# Altium PCB Misko 3.PcbDoc (part 3 of 4)
Units mm, origin at the board's own origin, x right, y up, seen from the top; angles counter-clockwise.
Board outline 128.1 x 53.3 mm, 6 copper layers (Top (LS), Mid 1 (LS), Mid 2 (GND), Mid 3 (P/HS), Mid 4 (GND), Bottom (HS)), stack 1.597 mm thick; 230 components, 214 nets, 896 pads, 500 vias.
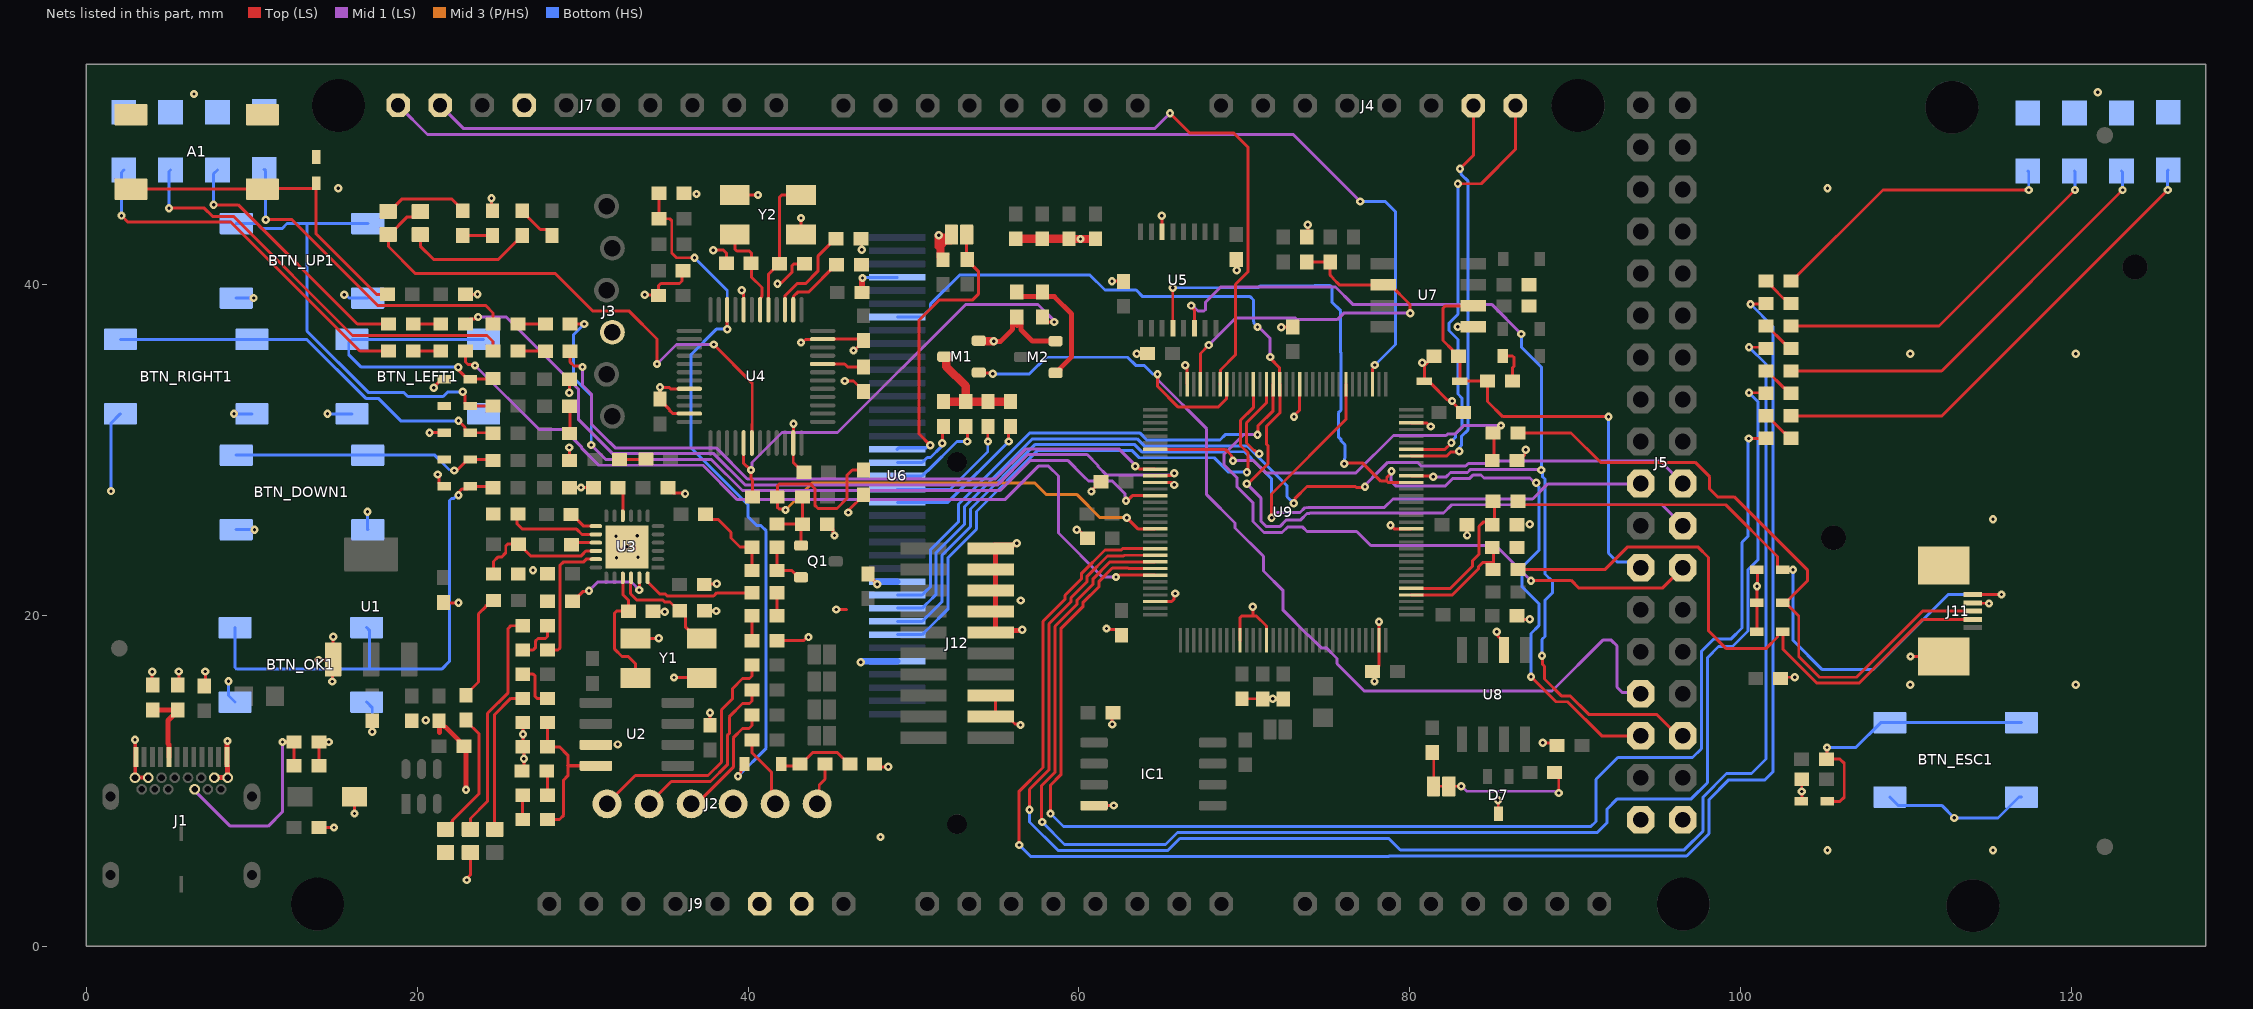
[diagram p7: the nets of this part, all layers, seen from the top]

## Via types
v1: diameter 0.5, hole 0.2, Top (LS) to Bottom (HS), tented both sides, 500 vias

## Nets (pads, with @x,y where several pads share a name; then routed paths per layer and width w, separated by ;. In a path a pad name is that pad's centre, name@x,y a point inside that pad or via, vN(x,y) a via of type N, cw(c..) or ccw(c..) an arc to the next point about the centre after c; other vN are vias at no path point) (continued)
GND: A1.3 A1.4 BTN_DOWN1.3 BTN_DOWN1.4 BTN_ESC1.3 BTN_ESC1.4 BTN_LEFT1.3 BTN_LEFT1.4 BTN_OK1.3 BTN_OK1.4 BTN_RIGHT1.3 BTN_RIGHT1.4 BTN_UP1.3 BTN_UP1.4 C1.1 C2.1 C3.1 C4.1 C5.1 C6.1 C7.1 C8.1 C9.1 C10.2 C11.2 C12.1 C13.1 C14.1 C15.1 C16.1 C17.1 C18.1 C19.1 C20.1 C21.1 C22.1 C23.1 C24.1 C25.1 C27.1 C28.1 C29.1 C30.1 C31.1 C32.1 C33.1 C34.1 C35.1 C36.1 C37.2 C38.1 C39.1 C40.1 C41.1 C42.1 C43.1 C44.1 C45.1 C46.1 C47.1 C48.1 C49.1 C50.1 C51.1 C52.1 C53.1 C54.1 C55.1 C56.1 C57.1 C58.1 C59.1 C60.1 D6.1 D7.3 D8.2 D9.2 D10.2 D11.2 D12.2 D13.2 D14.2 D15.2 D16.2 D17.2 IC1.4 J1.A1 J1.A12 J1.B1 J1.B12 J1.G1 J1.G2 J2.3 J3.4 J5.35 J5.36 J7.7 J9.6 J9.7 J11.0 J11.2 J12.3 J12.5 J12.11 J12.13 J12.15 J12.17 J12.19 LED1.1 LED3.1 LED6.1 LED7.1 LED8.1 LED9.1 LED10.1 LED11.1 LED12.1 LED13.1 M1.2 M2.2 R1.2 R2.2 R3.2 R4.2 R5.2 R10.1 R11.1 R16.1 R19.1 R24.1 R27.1 R29.1 R35.2 R43.2 R44.2 R45.1 R46.2 R51.2 R61.1 R66.2 R94.2 SB5.1 U1.1 U2.3 U3.25 U4.8 U4.20 U4.23 U4.35 U4.47 U5.6 U6.5 U6.11 U6.34 U7.5 U8.2 U9.12 U9.30 U9.42 U9.46 U9.63 U9.78 U9.94 U9.110 U9.127 Y1.2 Y1.4 Y2.2 Y2.4 | length 185.7
  Top (LS) w0.15: D7.3@85.35,8 85.325,8.025 v1(85.325,8.821) 85.392,8.754 v1@85.496,8.754 ; C41.1@86.574,29.355 86.624,29.355 86.949,29.68 86.949,29.949 v1(87,30) ; C49.1@103.684,10.091 103.689,10.086 v1(103.689,9.35) ; J11.2@114.013,20.75 114.033,20.73 114.98,20.73 v1(115,20.71)
  Top (LS) w0.18: v1(3.988,16.586) 3.988,15.811 R2.2@4.026,15.773 ; R1.2@5.526,15.773 5.6,15.847 v1(5.6,16.6) ; C2.1@7.129,15.723 7.2,15.794 v1(7.2,16.6) ; v1(14.06,17.291) 14.585,17.291 U1.1@14.619,17.325 ; R5.2@14.069,7.173 v1(14.973,7.173) ; R3.2@14.069,10.901 R4.2@14.069,12.336 14.071,12.334 v1(14.667,12.334) ; v1(14.877,15.994) U1.1@14.877,16.821 ; U1.1@14.919,17.325 14.924,17.33 v1(14.924,18.697) ; v1(16.219,8.019) C3.1@16.219,9.03 ; C6.1@17.282,13.573 17.288,13.567 v1(17.288,12.954) ; v1(20.75,31.029) 20.752,31.028 D15.2@21.642,31.026 D15.2@21.642,31.026 ; v1(21,33.75) 21,33.781 21.479,34.26 D13.2@21.642,34.26 ; v1(21.25,28.5) 21.25,28.413 21.319,28.344 21.319,27.952 21.479,27.792 D16.2@21.642,27.792 ; C7.1@21.601,20.769 21.62,20.75 v1(22.5,20.75) ; D12.2@21.629,29.422 D12.2@21.642,29.409 ; D11.2@21.634,32.651 D11.2@21.642,32.643 ; C46.1@22.929,39.393 v1(23.643,39.393) ; v1(23,4) 23,4.087 23.219,4.306 LED3.1@23.219,5.658 ; v1(24.5,45.2) 24.5,44.495 R51.2@24.552,44.443 ; C9.1@26.332,10.584 26.453,10.705 v1(26.453,11.324) 26.453,12.012 26.4,12.065 v1(26.4,12.8) 26.4,13.492 R11.1@26.382,13.51 ; C48.1@29.2,27.7 29.222,27.722 v1(29.904,27.722) 30.628,27.722 C10.2@30.65,27.7 ; C44.1@29.2,29.342 v1(29.2,30.133) ; C47.1@29.2,30.983 29.233,31.016 29.233,32.592 C43.1@29.2,32.625 ; v1(29.2,33.451) C45.1@29.2,34.267 ; Y1.4@33.2,18.6 v1(34.6,18.6) ; v1(33.761,39.361) 34.537,39.361 C19.1@34.578,39.321 34.578,39.893 34.726,40.042 35.861,40.042 36.01,40.19 36.01,40.749 C23.1@36.078,40.817 ; C12.1@34.266,20.242 34.308,20.2 v1(34.97,20.2) ; C15.1@35.15,27.7 35.46,27.39 36.143,27.39 v1(36.195,27.338) ; v1(35.519,16.231) 37.169,16.231 Y1.2@37.2,16.2 ; U4.23@36.456,32.182 35.449,32.182 35.239,32.392 35.239,32.443 34.675,33.007 C18.1@34.675,33.057 v1(34.675,33.771) 35.224,33.771 35.312,33.682 U4.20@36.456,33.682 ; C16.1@37.353,21.854 37.398,21.899 v1(38.1,21.899) ; C13.1@37.37,20.274 37.389,20.255 v1(38.081,20.255) ; C8.1@37.7,13.35 v1(37.7,14.1) ; v1(37.897,42.062) 38.509,42.062 38.688,41.883 C25.1@38.688,41.265 ; Y2.2@39.2,45.4 v1(40.6,45.4) ; v1(39.612,39.636) 39.612,39.549 39.718,39.443 39.718,38.471 U4.8@39.731,38.457 ; R24.1@41.739,18.456 41.759,18.476 43.368,18.476 43.568,18.676 v1(43.655,18.676) ; v1(41.781,40.031) 41.843,40.092 42.025,40.092 42.648,40.715 42.648,41.108 42.775,41.235 C24.1@43.408,41.235 ; v1(42.75,31.575) 42.741,31.566 42.741,31.086 42.731,31.076 U4.35@42.731,30.407 42.731,29.234 43.32,28.646 C17.1@43.37,28.646 ; v1(43.2,36.484) 43.287,36.484 43.471,36.669 44.493,36.669 U4.47@44.506,36.682 46.883,36.682 C21.1@46.97,36.596 46.97,36.546 46.424,36 v1(46.374,36) ; Y2.4@43.2,43 v1(43.2,44) ; R35.2@44.788,25.498 44.838,25.498 45.148,25.188 45.148,24.975 45.22,24.903 v1(45.22,24.816) ; v1(45.33,20.34) 45.95,20.34 45.96,20.35 ; v1(45.84,34.158) 46.37,34.158 46.97,33.558 R45.1@46.97,33.508 ; v1(46.06,26.209) 46.121,26.27 46.121,26.381 46.97,27.23 C22.1@46.97,27.28 ; R44.2@46.824,42.75 46.863,42.711 v1(46.863,42.088) ; C30.1@47.25,22.5 47.25,22.45 47.803,21.897 v1(47.803,21.873) ; R27.1@47.65,11 47.814,10.836 v1(48.467,10.836) ; C29.1@51.778,41.48 C29.1@52.088,41.79 ; v1@51.778,42.968 51.98,42.968 52,42.948 SB5.1@52,42.722 ; SB5.1@52.29,42.49 52.28,42.5 52,42.5 52,42.56 52.12,42.68 52.29,42.85 52.408,42.968 52.29,42.968 52.258,42.968 SB5.1@52.29,43 ; J12.3@54.665,13.87 J12.3@54.964,13.87 ; J12.5@54.665,15.14 54.684,15.14 54.964,14.86 J12.3@54.964,13.87 ; v1(56.46,13.361) 56.399,13.422 56.14,13.422 55.692,13.87 J12.3@54.964,13.87 ; v1(59.857,25.161) 59.918,25.099 60.013,25.099 60.457,24.655 C50.1@60.507,24.655 ; v1(60.75,27.475) 60.75,27.522 61.287,28.059 C57.1@61.337,28.059 ; IC1.4@60.914,8.495 60.917,8.497 62.097,8.497 v1(62.1,8.5) ; v1(61.663,19.199) 61.713,19.15 62.26,19.15 62.57,18.84 C55.1@62.57,18.79 ; v1(62.001,40.187) 62.671,40.187 C28.1@62.687,40.171 ; v1(62.004,13.4) 62.004,14.054 R94.2@62.05,14.1 ; v1(63.495,35.796) 64.12,35.796 C58.1@64.145,35.821 ; U9.30@64.598,20.823 65.605,20.823 65.755,20.973 65.755,21.255 v1(65.816,21.316) ; U9.12@64.598,28.023 64.608,28.013 65.582,28.013 65.72,27.875 v1(65.76,27.875) ; v1(65,44.136) 65.012,44.124 65.012,43.18 U5.6@65.025,43.168 ; v1(66.419,35.109) 66.419,35.023 66.526,34.916 66.526,33.971 U9.127@66.536,33.961 ; C27.1@69.525,41.725 69.529,41.721 v1(69.529,40.847) ; U9.42@69.736,18.485 69.743,18.492 69.743,19.86 69.848,19.965 70.554,19.965 ; C51.1@69.852,14.95 C52.1@71.1,14.95 ; v1(70.507,20.507) 70.507,20.012 70.554,19.965 ; C52.1@71.1,14.944 v1(71.714,14.944) v1@71.719,14.95 ; U9.46@71.336,18.485 71.326,18.495 71.326,19.343 70.703,19.965 70.554,19.965 ; v1(72.225,37.41) 72.91,37.41 C59.1@72.925,37.425 ; v1(73,32) 73,32.064 73.336,32.4 U9.110@73.336,33.961 ; R61.1@73.763,42.847 73.833,42.917 v1(73.833,43.6) ; v1(77.855,15.999) 77.855,16.495 C54.1@77.75,16.6 77.8,16.6 78.136,16.936 U9.63@78.136,18.485 v1(78.136,19.605) ; v1(78.825,25.43) 78.844,25.43 79.051,25.223 U9.78@80.074,25.223 ; U9.94@80.074,31.623 81.001,31.623 81.221,31.402 v1(81.254,31.402) ; C37.2@81.444,35.649 81.394,35.649 81.084,35.339 81.084,35.289 80.869,35.074 D6.1@80.869,34.149 81.004,34.014 81.254,34.014 82.258,33.011 82.489,33.011 v1(82.55,32.95) 82.55,32.9 83.2,32.25 C60.1@83.25,32.25 ; v1(82.897,37.424) U7.5@83.829,37.424 ; C53.1@83.44,25.473 83.456,25.457 v1(83.456,24.823) ; v1(85.25,19) 85.311,18.939 85.311,18.735 85.678,18.369 U8.2@85.678,17.894 ; C38.1@86.622,20.023 86.622,19.962 86.834,19.75 v1(87.25,19.75) ; v1(88.032,12.29) 88.535,12.29 88.563,12.318 R66.2@88.563,12.348 ; D8.2@100.962,19 100.989,19.027 100.989,20.723 D10.2@100.962,20.75 100.974,20.762 v1(100.974,21.75) ; D9.2@100.962,22.75 101,22.712 v1@101,21.75 ; C39.1@102.4,16.168 102.482,16.25 v1(103.25,16.25) ; D17.2@103.646,8.75 103.689,8.794 v1(103.689,9.35) ; v1(110.25,17.5) J11.0@112.263,17.5
  Top (LS) w0.22: v1(2.95,12.48) 2.968,12.462 2.968,11.456 J1.A1@2.986,11.438 ; J1.A1@2.961,11.441 2.961,10.213 2.936,10.188 J1.G2@3.736,10.188
  Top (LS) w0.3: J1.G1@7.736,10.188 8.536,10.188 J1.B1@8.55,10.202 ; J1.A12@8.5,11.43 8.5,10.98 8.55,10.93 J1.B1@8.55,10.202 ; J1.A12@8.511,11.463 8.511,12.369 v1(8.536,12.394) ; J1.B1@8.55,10.18 J1.B1@8.55,10.202 ; 21.359,12.91 C5.1@21.359,13.533 ; v1(22.959,9.458) 22.959,12.05 22.909,12.05 21.7,13.259 21.633,13.259 C5.1@21.359,13.533 ; J12.11@54.665,18.95 54.8,19.085 56.527,19.085 v1(56.565,19.123) ; J12.13@54.665,20.22 J12.13@54.744,20.22 ; J12.15@54.665,21.49 J12.15@54.744,21.49 ; J12.17@54.665,22.76 J12.17@54.744,22.76 ; J12.19@54.665,24.03 54.885,24.25 56.086,24.25 56.178,24.342 v1(56.232,24.342) ; J12.19@54.744,24.03 54.964,23.81 54.964,22.98 J12.17@54.744,22.76 ; v1(54.856,36.555) 55.264,36.555 55.991,37.282 55.991,37.777 R46.2@56.241,38.027 ; J12.11@54.964,19.162 54.964,20 J12.13@54.744,20.22 ; 56.244,37.508 56.244,38.024 R46.2@56.241,38.027 ; M2.2@58.584,36.562 57.19,36.562 56.491,37.261 56.491,37.777 R46.2@56.241,38.027 ; C5.1@21.359,13.533 21.359,13.583 C5.1@21.323,13.619 21.323,13.569 C5.1@21.359,13.533 ; J12.13@54.744,20.22 54.964,20.44 54.964,21.27 J12.15@54.744,21.49 ; J12.15@54.744,21.49 54.964,21.71 54.964,22.54 J12.17@54.744,22.76
  Top (LS) w0.381: C20.1@46.89,39.502 46.891,39.503 46.891,40.328 46.915,40.352 v1(46.915,40.384)
  Top (LS) w0.5: C29.1@51.778,41.48 51.628,41.63 51.628,42.162 ; 51.778,42.488 51.61,42.32 51.61,42.208 ; 51.778,42.722 v1(51.532,42.968) 51.532,42.286 51.61,42.208 ; SB5.1@51.895,42.605 51.97,42.68 52.12,42.68 52.14,42.68 52.29,42.83 52.29,42.85 52.29,42.968 SB5.1@52.29,43 ; M1.2@53.946,36.587 53.977,36.555 v1(54.856,36.555) ; C34.1@56.174,42.75 C33.1@57.783,42.75 C32.1@59.391,42.75 ; C32.1@59.433,42.635 59.529,42.73 v1(60.091,42.73) 60.98,42.73 C31.1@61,42.75 ; 51.61,42.208 51.61,42.18 51.628,42.162 ; 51.61,42.208 51.628,42.19 51.628,42.162
  Bottom (HS) w0.15: v1(46.915,40.384) v1@46.935,40.404 ; U6.34@49.002,40.404 U6.34@49.022,40.423
  Bottom (HS) w0.18: v1(1.5,27.5) 1.5,31.607 2.06,32.167 BTN_RIGHT1.4@2.067,32.167 ; v1(8.6,16) 8.6,15.15 BTN_OK1.4@9,14.75 ; v1(8.938,32.167) BTN_RIGHT1.3@10.017,32.167 ; BTN_DOWN1.4@9.067,25.167 v1(10.174,25.167) ; BTN_UP1.4@9.067,39.167 v1(10.117,39.167) ; v1(14.588,32.167) BTN_LEFT1.4@16.067,32.167 ; v1(15.6,39.369) 15.687,39.369 15.887,39.169 17.015,39.169 BTN_UP1.3@17.017,39.167 ; BTN_OK1.3@16.95,14.75 17.288,14.412 v1(17.288,12.954) ; v1(17,26.25) 17,25.184 BTN_DOWN1.3@17.017,25.167 ; BTN_ESC1.4@109.004,9.006 109.499,8.511 112.138,8.511 v1(112.899,7.75) 115.548,7.75 116.804,9.006 BTN_ESC1.3@116.954,9.006
  Bottom (HS) w0.2: v1@46.935,40.404 U6.34@49.002,40.404
  Bottom (HS) w0.381: v1(46.808,17.15) 46.84,17.15 46.914,17.223 U6.5@49.022,17.223 ; v1(47.803,21.873) 47.803,22.014 47.812,22.023 U6.11@49.022,22.023
  other v1: 105.24,5.8 115.24,5.8 48,6.6 32.131,12.192 20.524,13.647 110.24,15.8 120.24,15.8 56.488,20.888 27,22.722 32.051,23.467 33.347,23.502 32.681,24.132 32.016,24.763 33.312,24.798 87.25,25.5 115.24,25.8 80.75,35.25 110.24,35.8 120.24,35.8 36.878,45.456 15.24,45.8 105.24,45.8 6.515,51.5 121.578,51.601
I2C1_SCL: J7.10 U9.99 | length 73.9
  Top (LS) w0.18: U9.99@77.736,33.961 77.736,34.891 77.878,35.034 v1(77.878,35.12)
  Mid 1 (LS) w0.18: J7.10@18.854,50.82 20.624,49.05 72.95,49.05 v1(77,45)
  Bottom (HS) w0.18: v1(77,45) 78.513,45 79.127,44.386 79.127,36.364 77.884,35.12 v1(77.878,35.12)
I2C1_SDA: J7.9 U9.122 | length 65.7
  Top (LS) w0.18: v1(65.5,50.339) 66.707,49.132 69.371,49.132 70.217,48.286 70.217,40.752 69.46,39.996 69.46,35.733 68.546,34.819 68.546,33.971 U9.122@68.536,33.961
  Mid 1 (LS) w0.18: J7.9@21.394,50.82 22.814,49.4 64.561,49.4 v1(65.5,50.339)
I2C2_SCL: J4.1 U9.90 | length 26.1
  Top (LS) w0.18: U9.90@80.074,30.023 82.119,30.023 82.507,30.411 v1(82.507,30.416) ; v1(82.9,46.075) 84.307,46.075 86.371,48.139 J4.1@86.371,50.8
  Bottom (HS) w0.18: v1(82.507,30.416) 82.507,30.503 82.747,30.743 82.747,30.947 83.16,31.36 83.16,33.104 82.9,33.364 82.9,36.658 82.357,37.201 82.357,37.648 82.9,38.191 v1(82.9,46.075)
I2C2_SDA: J4.2 U9.89 | length 24.7
  Top (LS) w0.18: U9.89@80.074,29.623 80.084,29.633 82.238,29.633 82.46,29.855 82.935,29.855 v1(82.98,29.9) ; v1(83.025,46.975) 83.831,47.781 J4.2@83.831,50.8
  Bottom (HS) w0.18: v1(82.98,29.9) 83.041,29.961 83.041,30.187 83.107,30.253 83.107,30.798 83.52,31.211 83.52,46.219 83.086,46.652 83.086,46.914 v1(83.025,46.975)
JOY_BTN: C41.2 R68.1 U9.7 | length 25.1
  Top (LS) w0.18: U9.7@64.598,30.023 68.834,30.023 69.211,29.647 69.211,29.596 69.248,29.559 69.248,29.399 v1(69.309,29.337) ; R68.1@85.024,31.017 85.074,30.967 C41.2@85.074,29.355 ; R68.1@85.074,31.017 85.5,31.444 v1(85.5,31.46)
  Mid 1 (LS) w0.18: v1(69.309,29.337) 70.553,29.337 71.285,28.606 76.749,28.606 79.005,30.862 82.189,30.862 82.284,30.956 82.745,30.956 83.249,31.46 v1(85.5,31.46)
JOY_X: C42.2 R69.1 U9.68 | length 7.1
  Top (LS) w0.18: U9.68@80.074,21.223 82.566,21.223 84.15,22.807 84.15,22.934 84.391,23.175 85.061,23.175 C42.2@85.061,24.402
JOY_Y: C40.2 R67.1 U9.69 | length 9.1
  Top (LS) w0.18: U9.69@80.074,21.623 82.457,21.623 83.79,22.956 83.79,23.29 84.18,23.68 84.18,25.372 84.426,25.619 85.061,25.619 85.111,25.669 R67.1@85.111,26.885
LCD_BKLT: J5.29 M1.1 U9.121 | length 63.5
  Top (LS) w0.18: M1.1@53.946,34.667 53.986,34.626 54.755,34.626 v1(54.795,34.586) ; v1(64.745,34.561) 64.745,33.834 66.005,32.574 68.396,32.574 68.926,33.103 68.926,33.951 U9.121@68.936,33.961
  Mid 1 (LS) w0.18: v1(64.745,34.561) 64.772,34.533 64.772,34.214 67.719,31.267 67.719,27.283 69.434,25.569 69.434,25.27 71.148,23.556 71.148,22.673 72.34,21.481 72.34,20.298 73.848,18.791 73.873,18.791 74.639,18.025 74.948,18.025 75.595,17.378 75.595,17.07 77.241,15.424 78.009,15.424 88.595,15.424 91.659,18.488 92.173,18.488 92.508,18.153 92.508,15.652 92.844,15.317 93.888,15.317 J5.29@93.952,15.253
  Bottom (HS) w0.18: v1(54.795,34.586) 57.016,34.586 58.02,35.589 62.938,35.589 63.426,35.101 63.934,35.101 64.475,34.561 v1(64.745,34.561)
LCD_CS: U6.7 U9.117 | length 34.6
  Top (LS) w0.18: v1(70.148,28.644) 70.209,28.706 70.209,28.964 70.216,28.971 70.216,29.811 69.765,30.261 69.765,31.775 70.536,32.545 U9.117@70.536,33.961
  Bottom (HS) w0.18: U6.7@49.022,18.823 50.522,18.823 50.832,19.133 50.842,19.133 52.092,20.383 52.092,23.486 53.804,25.198 53.804,26.263 57.483,29.942 63.221,29.942 63.649,29.515 68.172,29.515 69.042,28.644 v1(70.148,28.644)
LCD_RD: J5.24 U6.10 U9.114 | length 67.2
  Top (LS) w0.18: v1(70.784,30.909) 70.809,30.934 70.809,31.429 71.736,32.355 U9.114@71.736,33.961 ; v1(87.321,22.082) 87.348,22.109 89.748,22.109 90.224,21.633 95.252,21.633 J5.24@96.492,22.873
  Mid 1 (LS) w0.18: v1(70.784,30.909) 69.95,30.909 68.769,29.728 68.769,29.088 69.54,28.317 69.54,27.777 70.52,26.797 70.52,25.668 71.186,25.002 72.275,25.002 72.595,25.322 73.529,25.322 73.787,25.064 76.784,25.064 77.638,24.21 85.193,24.21 v1(87.321,22.082)
  Bottom (HS) w0.18: U6.10@49.022,21.223 50.522,21.223 50.832,21.533 50.842,21.533 51.012,21.703 51.012,22.207 51.012,23.512 51.012,23.934 52.724,25.645 52.724,26.71 57.036,31.022 63.669,31.022 64.096,30.595 68.526,30.595 68.84,30.909 v1(70.784,30.909)
LCD_RS: J5.19 U6.8 U9.103 | length 65.6
  Top (LS) w0.18: v1(71.641,25.892) 71.641,27.168 71.629,27.18 71.629,27.329 76.136,31.836 U9.103@76.136,33.961
  Mid 1 (LS) w0.18: v1(71.641,25.892) 71.957,26.208 73.357,26.208 73.642,26.494 73.798,26.494 73.827,26.522 78.47,26.522 78.973,27.025 87.417,27.025 88.332,27.94 93.94,27.94 J5.19@93.952,27.953
  Bottom (HS) w0.18: U6.8@49.022,19.623 50.522,19.623 50.832,19.933 50.842,19.933 51.732,20.823 51.732,23.635 53.444,25.347 53.444,26.412 57.334,30.302 63.371,30.302 63.798,29.875 68.824,29.875 68.827,29.877 70.013,29.877 70.846,29.045 71.641,28.25 v1(71.641,25.892)
LCD_RST: J5.22 U6.31 U9.113 | length 65.5
  Top (LS) w0.18: v1(70.136,27.945) 70.211,27.945 71.433,29.166 71.433,30.232 71.324,30.341 71.324,31.406 72.136,32.218 U9.113@72.136,33.961 72.126,33.971 72.126,34.955 71.553,35.527 v1(71.553,35.602)
  Mid 1 (LS) w0.18: v1(70.136,27.945) 71.014,27.067 71.014,25.669 71.331,25.352 72.131,25.352 72.54,25.762 73.406,25.762 73.787,26.144 73.943,26.144 73.972,26.172 82.026,26.172 82.529,26.675 95.23,26.675 J5.22@96.492,25.413 ; v1(70.785,37.419) 70.869,37.419 71.535,36.753 71.535,35.62 v1(71.553,35.602)
  Bottom (HS) w0.18: U6.31@49.022,38.023 50.522,38.023 50.832,38.333 50.842,38.333 51.012,38.503 51.012,38.785 52.787,40.56 60.658,40.56 61.571,39.647 63.456,39.647 63.853,39.25 70.347,39.25 70.55,39.047 70.55,37.738 70.573,37.716 70.573,37.631 v1(70.785,37.419)
LCD_WR: J5.20 U6.9 U9.115 | length 63.1
  Top (LS) w0.18: v1(70.893,29.761) 70.823,29.761 70.628,29.956 70.579,29.956 70.125,30.41 70.125,31.625 71.336,32.836 U9.115@71.336,33.961 ; v1(72.981,26.76) 73.043,26.821 73.043,27.036 73.778,27.771 76.706,27.771 76.761,27.716 77.238,27.716 v1(77.281,27.758)
  Mid 1 (LS) w0.18: v1(77.281,27.758) 77.281,27.845 77.42,27.984 77.42,27.995 78.003,28.578 78.663,29.239 80.455,29.239 80.684,29.01 83.371,29.01 83.529,29.168 84.534,29.168 84.684,29.318 95.129,29.318 96.492,27.955 J5.20@96.492,27.953
  Bottom (HS) w0.18: U6.9@49.022,20.423 50.522,20.423 50.832,20.733 50.842,20.733 51.372,21.263 51.372,23.784 53.084,25.496 53.084,26.561 57.185,30.662 63.52,30.662 63.947,30.235 68.675,30.235 68.677,30.237 70.163,30.237 v1@70.766,29.634 ; v1(70.893,29.761) v1@70.766,29.634 ; v1(72.981,26.76) 72.576,27.165 72.576,27.824 72.137,28.263 71.778,28.622 v1@70.766,29.634
LED0: R77.2 U9.26 | length 51.5
  Top (LS) w0.18: R77.2@22.929,35.965 22.929,35.295 23.068,35.156 23.439,35.156 v1(23.5,35.095) ; v1(62.236,22.312) 62.322,22.312 62.433,22.423 U9.26@64.598,22.423
  Mid 1 (LS) w0.18: v1(23.5,35.095) 27.36,31.235 28.862,31.235 29.947,30.15 29.947,30.095 30.981,29.062 37.274,29.062 39.353,26.983 55.515,26.983 57.539,29.007 58.159,29.007 58.756,28.41 58.756,24.967 61.411,22.312 v1(62.236,22.312)
LED1: R76.2 U9.10 | length 41.7
  Top (LS) w0.18: R76.2@29.25,35.958 29.25,35.288 29.48,35.058 29.942,35.058 v1(30,35) ; 63.624,28.823 U9.10@64.598,28.823
  Mid 1 (LS) w0.18: v1(30,35) 30,33.91 30.535,33.375 30.535,31.537 31.217,30.855 31.224,30.855 31.967,30.112 38.072,30.112 39.954,28.23 54.948,28.23 56.776,30.057 62.408,30.057 63.4,29.066 v1(63.4,29)
LED2: R75.2 U9.11 | length 50.9
  Top (LS) w0.18: R75.2@22.929,37.6 23.239,37.91 23.485,37.91 23.599,38.024 v1(23.686,38.024) ; U9.11@64.598,28.423 64.608,28.433 65.531,28.433 65.673,28.575 v1(65.76,28.575)
  Mid 1 (LS) w0.18: v1(23.686,38.024) 25.391,38.024 29.74,33.675 29.74,31.837 31.815,29.762 37.927,29.762 39.809,27.88 55.093,27.88 56.921,29.707 60.493,29.707 61.151,29.05 61.151,28.989 61.68,28.46 65.558,28.46 65.673,28.575 v1(65.76,28.575)
LED3: R74.2 U9.14 | length 46.2
  Top (LS) w0.18: R74.2@29.25,37.6 v1(30.103,37.6) ; v1(62.837,26.923) 62.924,26.923 63.224,27.223 U9.14@64.598,27.223
  Mid 1 (LS) w0.18: v1(30.523,30.284) 31.394,29.412 37.782,29.412 39.664,27.53 55.238,27.53 57.066,29.357 59.316,29.357 60.273,28.401 60.279,28.401 60.569,28.11 62.011,28.11 62.776,27.345 62.776,26.984 v1(62.837,26.923)
  Bottom (HS) w0.18: v1(30.103,37.6) 29.46,36.957 29.46,34.334 30.523,33.272 v1(30.523,30.284)
LED4: R73.2 U9.22 | length 102.1
  Top (LS) w0.18: v1(56.385,6.115) 56.385,9.362 57.825,10.802 57.825,19.629 59.153,20.956 59.153,21.202 60.139,22.188 60.139,22.506 61.575,23.943 62.555,23.943 62.635,24.023 U9.22@64.598,24.023 ; v1@100.497,38.944 100.64,38.8 101.496,38.8 R73.2@101.532,38.837
  Bottom (HS) w0.18: v1(56.385,6.115) 57.073,5.427 78.724,5.427 78.747,5.451 96.724,5.451 98.069,6.795 98.069,8.853 99.264,10.048 101.464,10.048 101.947,10.531 101.947,37.437 v1(100.583,38.8)
LED5: R72.2 U9.23 | length 96.6
  Top (LS) w0.18: v1(57.01,8.24) 57.01,9.478 58.185,10.653 58.185,19.48 59.513,20.807 59.513,21.053 60.499,22.039 60.499,22.357 61.724,23.583 62.705,23.583 62.745,23.623 U9.23@64.598,23.623 ; v1(100.497,36.194) 101.461,36.194 R72.2@101.532,36.122
  Bottom (HS) w0.18: v1(57.01,8.24) 57.01,7.504 58.727,5.787 65.376,5.787 66.096,6.507 78.724,6.507 79.42,5.811 96.313,5.811 96.325,5.822 96.587,5.822 97.709,6.944 97.709,9.002 99.14,10.433 100.643,10.433 101.514,11.303 101.514,35.177 v1(100.497,36.194)
LED6: R71.2 U9.24 | length 89.6
  Top (LS) w0.18: v1(57.774,7.504) 57.738,7.539 57.738,9.697 58.545,10.504 58.545,19.33 59.873,20.658 59.873,20.904 60.859,21.89 60.859,22.208 61.874,23.223 U9.24@64.598,23.223 ; v1(100.497,33.444) 101.497,33.444 R71.2@101.532,33.408
  Bottom (HS) w0.18: v1(57.774,7.504) 59.131,6.147 65.227,6.147 65.947,6.867 91.324,6.867 91.908,7.451 91.908,8.273 92.538,8.903 97.007,8.903 97.98,9.876 97.98,17.429 98.654,18.103 99.498,18.103 100.434,19.038 100.434,22.75 101.031,23.347 101.031,31.073 101.037,31.079 101.037,32.904 v1(100.497,33.444)
LED7: R70.2 U9.25 | length 83.7
  Top (LS) w0.18: v1(58.278,8.009) 58.278,9.728 58.905,10.354 58.905,19.181 60.233,20.509 60.233,20.755 61.219,21.741 61.219,22.059 62.012,22.852 62.966,22.852 62.996,22.823 U9.25@64.598,22.823 ; v1(100.482,30.683) 101.522,30.683 R70.2@101.532,30.694
  Bottom (HS) w0.18: v1(58.278,8.009) 59.06,7.227 90.935,7.227 91.244,7.536 91.244,10.079 92.564,11.399 97.083,11.399 97.62,11.936 97.62,17.828 98.343,18.55 99.392,18.55 100.074,19.232 100.074,24.404 100.436,24.767 100.436,30.637 v1(100.482,30.683)
LED_5: LED4.1 LED5.2 U4.30 | length 34.1
  Top (LS) w0.18: LED4.1@20.195,44.4 19.871,44.075 19.4,44.075 18.325,43 LED5.2@18.25,43 18.269,42.981 18.269,42.28 19.909,40.64 28.36,40.64 30.605,38.395 32.793,38.395 34.5,36.688 v1(34.5,35.179) ; v1(37.921,36.356) 40.253,34.024 40.253,31.576 40.231,31.554 U4.30@40.231,30.407
  Mid 1 (LS) w0.18: v1(34.5,35.179) 35.677,36.356 v1(37.921,36.356)
LIN_BUS: C37.1 D6.2 J5.23 R60.2 U7.6 | length 27.9
  Top (LS) w0.18: U7.6@83.829,38.694 82.137,38.694 81.997,38.555 81.997,36.596 82.584,36.009 82.584,35.959 82.894,35.649 C37.1@82.944,35.649 83.019,35.574 D6.2@83.019,34.149 R60.2@84.694,34.149 84.694,32.921 85.616,32 v1(92,32)
  Bottom (HS) w0.18: v1(92,32) 92,23.75 92.548,23.202 93.623,23.202 J5.23@93.952,22.873
LIN_SLP: R58.2 R61.2 U7.2 U9.125 | length 24
  Top (LS) w0.18: U9.125@67.336,33.961 67.346,33.971 67.346,35.823 v1(67.846,36.323) ; R61.2@73.763,41.347 R58.2@75.18,41.347 75.18,40.548 75.348,40.38 75.348,40.345 75.729,39.964 U7.2@78.379,39.964 78.804,39.964 79.999,38.77 79.999,38.279 v1(80.027,38.25)
  Mid 1 (LS) w0.18: v1(67.846,36.323) 69.481,37.959 73.078,37.959 73.175,37.862 75.607,37.862 75.996,38.25 v1(80.027,38.25)
MCI: C22.2 R42.1 U9.19 | length 34.2
  Top (LS) w0.18: v1(42.26,26.362) 42.21,26.412 41.878,26.412 41.767,26.523 41.767,27.812 41.872,27.918 43.783,27.918 44.038,27.662 44.038,26.642 44.228,26.452 45.368,26.452 45.97,27.054 45.97,28.449 46.3,28.78 C22.2@46.97,28.78 ; v1(62.888,25.89) 63.555,25.223 U9.19@64.598,25.223
  Mid 3 (P/HS) w0.18: v1(42.26,26.362) 43.899,28.001 57.314,28.001 58.012,27.302 59.86,27.302 61.272,25.89 v1(62.888,25.89)
MISO: J5.31 U5.12 U9.85 | length 59.5
  Top (LS) w0.18: v1(65.659,39.79) 65.667,39.782 65.667,37.34 U5.12@65.675,37.332 ; v1(76.038,29.146) 76.08,29.188 77.15,29.188 78.239,28.1 78.6,28.1 ; v1(78.887,28.699) 78.887,28.612 78.6,28.325 78.6,28.1 ; U9.85@80.074,28.023 78.677,28.023 78.6,28.1 ; v1(87.32,16.273) 88.824,14.769 89.531,14.769 91.587,12.713 J5.31@93.952,12.713
  Mid 1 (LS) w0.18: v1(78.887,28.699) 78.871,28.683 78.871,28.089 79.138,27.822 82.151,27.822 82.599,28.27 83.621,28.27 83.804,28.453 83.819,28.468 84.296,28.468 84.474,28.29 87.251,28.29 87.542,28 v1(87.628,28)
  Bottom (HS) w0.18: v1(65.659,39.79) 70.822,39.79 70.93,39.899 74.196,39.899 74.225,39.927 75.178,39.927 75.283,39.822 75.283,38.933 75.819,38.397 75.819,35.877 75.833,35.864 75.833,32.393 75.673,32.233 75.673,30.78 75.847,30.606 75.847,30.521 76.073,30.295 76.073,29.509 76.041,29.477 76.041,29.149 v1(76.038,29.146) ; v1(87.32,16.273) 87.32,18.893 87.79,19.363 87.79,20.705 86.781,21.714 86.781,22.893 87.808,23.92 87.808,27.733 87.628,27.913 v1(87.628,28)
MOSI: J5.32 U5.14 U9.86 | length 63.3
  Top (LS) w0.18: v1(66.785,38.71) 66.785,38.623 66.975,38.433 U5.14@66.975,37.332 ; U9.86@80.074,28.423 80.084,28.413 81.367,28.413 v1(81.418,28.362) ; v1(87.988,17.546) 88.021,17.513 88.021,17.026 88.139,16.908 88.139,16.138 89.149,15.129 89.68,15.129 90.801,14.008 94.905,14.008 96.2,12.713 J5.32@96.492,12.713
  Mid 1 (LS) w0.18: v1(66.785,38.71) 66.862,38.71 67.191,38.381 67.555,38.381 67.66,38.486 67.66,38.934 68.562,39.835 75.5,39.835 76.545,38.79 84.94,38.79 v1(86.73,37) ; v1(81.418,28.362) 82.196,28.362 82.454,28.62 83.476,28.62 83.674,28.818 87.904,28.818 v1(87.944,28.778)
  Bottom (HS) w0.18: v1(86.73,37) 86.73,36.208 87.944,34.993 v1@87.944,28.691 ; v1(87.988,17.546) 87.988,18.54 88.168,18.72 88.168,20.904 88.609,21.345 88.609,22.05 88.168,22.491 88.168,28.224 88.006,28.386 v1@88.006,28.63
NetA1_1: A1.1 A1.2 D14.1 R89.2 | length 20.2
  Top (LS) w0.18: A1.2@2.7,45.75 A1.1@10.65,45.75 10.689,45.789 13.74,45.789 D14.1@13.9,45.949 ; D14.1@13.9,46.112 D14.1@13.9,45.949 ; R89.2@18.202,39.393 17.542,39.393 13.9,43.035 D14.1@13.9,45.949
NetBTN_DOWN1_1: BTN_DOWN1.1 BTN_DOWN1.2 D12.1 R87.2 | length 15.9
  Top (LS) w0.18: v1(22.25,28.75) 22.311,28.811 22.457,28.811 23.055,29.409 24.53,29.409 R87.2@24.59,29.35
  Bottom (HS) w0.18: BTN_DOWN1.2@9.067,29.667 17.217,29.667 21.071,29.667 21.93,28.809
NetBTN_ESC1_1: BTN_ESC1.1 BTN_ESC1.2 D17.1 R92.2 | length 17.5
  Top (LS) w0.18: R92.2@105.174,11.301 R92.2@105.224,11.301 ; v1(105.21,12.001) 105.21,11.314 R92.2@105.224,11.301 ; D17.1@105.222,8.75 105.351,8.88 105.504,8.88 105.634,8.75 106,8.75 106.25,9 106.25,11.051 106,11.301 R92.2@105.224,11.301
  Bottom (HS) w0.18: v1(105.21,12.001) 106.949,12.001 108.454,13.506 BTN_ESC1.1@116.954,13.506
NetBTN_LEFT1_1: BTN_LEFT1.1 BTN_LEFT1.2 D13.1 R88.2 | length 18.4
  Top (LS) w0.18: v1(22.484,34.989) 22.546,34.928 22.546,34.77 23.055,34.26 24.55,34.26 R88.2@24.59,34.3
  Bottom (HS) w0.18: v1(22.484,34.989) 16.625,34.989 15.867,35.747 15.867,36.467 BTN_LEFT1.2@16.067,36.667 BTN_LEFT1.1@24.017,36.667
NetBTN_OK1_1: BTN_OK1.1 BTN_OK1.2 D16.1 R91.2 | length 31.1
  Top (LS) w0.18: v1(22.5,27.25) 22.561,27.311 22.561,27.489 22.704,27.632 23.058,27.632 D16.1@23.218,27.792 24.497,27.792 R91.2@24.59,27.7
  Bottom (HS) w0.18: BTN_OK1.2@9,19.25 9,16.842 9.105,16.737 17.028,16.737 ; BTN_OK1.1@16.95,19.25 17.133,19.067 17.133,16.842 17.028,16.737 ; v1(22.5,27.25) 22.413,27.25 22.218,27.055 22.087,27.055 21.96,26.927 21.96,17.21 21.487,16.737 17.028,16.737
NetBTN_RIGHT1_1: BTN_RIGHT1.1 BTN_RIGHT1.2 D15.1 R90.2 | length 25
  Top (LS) w0.18: v1(22.5,31.75) 22.895,31.355 22.895,31.186 23.055,31.026 24.563,31.026 R90.2@24.59,31
  Bottom (HS) w0.18: BTN_RIGHT1.2@2.067,36.667 13.336,36.667 16.896,33.107 17.65,33.107 19.008,31.75 v1(22.5,31.75)
NetBTN_UP1_1: BTN_UP1.1 BTN_UP1.2 D11.1 R86.2 | length 28.4
  Top (LS) w0.18: v1(22.75,33.5) 22.75,33.413 22.895,33.268 22.895,32.803 23.055,32.643 24.583,32.643 R86.2@24.59,32.65
  Bottom (HS) w0.18: BTN_UP1.2@9.067,43.667 10.319,43.667 10.626,43.36 11.835,43.36 12.142,43.667 13.35,43.667 ; BTN_UP1.1@17.017,43.667 13.35,43.667 ; v1(22.75,33.5) 21.865,33.5 21.575,33.21 19.439,33.21 19.181,33.467 17.045,33.467 13.35,37.162 13.35,43.667
NetC9_2: C9.2 R13.1 | length 1.5
  Top (LS) w0.18: C9.2@27.832,10.584 27.882,10.534 R13.1@27.882,9.121
NetC10_1: C10.1 U3.10 | length 1.8
  Top (LS) w0.18: C10.1@32.15,27.7 32.431,27.419 U3.10@32.431,26.008
NetC11_1: C11.1 U3.23 | length 5.5
  Top (LS) w0.18: C11.1@29.381,20.84 29.431,20.84 30.009,21.418 30.326,21.418 v1(30.387,21.479) ; v1(33.429,21.523) 33.43,21.524 U3.23@33.431,22.257 U3.23@33.431,22.257
  Mid 1 (LS) w0.18: v1(30.387,21.479) 30.911,22.003 32.95,22.003 v1(33.429,21.523)
NetC12_2: C12.2 U3.21 Y1.1 | length 7.7
  Top (LS) w0.18: U3.21@32.431,22.257 32.431,21.248 32.766,20.914 C12.2@32.766,20.242 32.046,20.242 31.94,20.137 31.94,17.949 32.38,17.51 32.76,17.51 33.2,17.07 Y1.1@33.2,16.2
NetC13_2: C13.2 U3.22 Y1.3 | length 6.8
  Top (LS) w0.18: U3.22@32.931,22.257 32.931,21.98 32.889,21.938 32.889,21.3 33.257,20.932 34.836,20.932 34.964,20.804 35.29,20.804 35.82,20.274 C13.2@35.87,20.274 35.92,20.274 36.23,19.964 36.23,19.27 36.9,18.6 Y1.3@37.2,18.6
NetC24_2: C24.2 U4.5 Y2.1 | length 8.5
  Top (LS) w0.18: U4.5@41.231,38.457 41.231,40.608 41.858,41.235 C24.2@41.908,41.235 41.908,45.278 42.03,45.4 Y2.1@43.2,45.4
NetC25_2: C25.2 U4.6 Y2.3 | length 5.7
  Top (LS) w0.18: Y2.3@39.2,43 39.2,42.13 39.324,42.006 40.076,42.006 40.2,41.883 40.2,41.276 C25.2@40.188,41.265 40.2,41.253 40.2,40.445 40.836,39.809 40.836,39.299 40.816,39.279 40.816,39.211 40.731,39.126 U4.6@40.731,38.457
NetD2_1: D2.1 R26.2 R29.2 U4.10 | length 44.1
  Top (LS) w0.18: R29.2@34.628,45.506 R26.2@34.628,43.96 35.261,43.96 35.388,43.833 35.388,41.893 35.679,41.602 v1(36.76,41.602) ; U4.10@38.731,38.457 38.737,38.452 38.737,37.288 v1(38.742,37.282) ; v1(39.394,10.258) 39.394,10.345 39.56,10.511 39.56,10.775 D2.1@39.785,11
  Bottom (HS) w0.18: v1(36.76,41.602) 38.742,39.621 v1(38.742,37.282) 38.083,37.282 36.56,35.759 36.56,30.111 40.006,26.665 40.006,25.938 40.533,25.411 40.788,25.411 41.097,25.102 41.097,11.961 v1(39.394,10.258)
NetD2_2: D2.2 R25.2 R27.2 | length 4.7
  Top (LS) w0.18: D2.2@42.015,11 42.115,10.9 43.05,10.9 R25.2@43.15,11 ; R25.2@43.2,11 43.89,11.69 45.41,11.69 46.1,11 R27.2@46.15,11
NetD5_1: D5.1 R60.1 | length 2.2
  Top (LS) w0.18: D5.1@85.615,35.671 86.2,35.671 86.305,35.566 86.305,35.068 86.194,34.957 R60.1@86.194,34.149
NetD8_1: D8.1 J11.4 R69.2 | length 37.2
  Top (LS) w0.18: R69.2@86.484,22.75 91.776,22.75 93.158,24.132 97.398,24.132 98.038,23.492 98.038,19.057 99.095,18 101.538,18 102.215,18.678 102.215,18.84 102.375,19 D8.1@102.538,19 102.538,17.953 104.601,15.89 107.14,15.89 111,19.75 J11.4@114.013,19.75
NetD9_1: D9.1 J11.1 R67.2 | length 39.8
  Top (LS) w0.18: R67.2@86.611,26.885 86.821,26.675 99.087,26.675 102.215,23.546 102.215,22.91 102.375,22.75 v1(103.15,22.75) ; J11.1@114.013,21.25 v1(115.75,21.25)
  Bottom (HS) w0.18: v1(103.15,22.75) 103.15,18.482 104.923,16.71 107.992,16.71 112.533,21.25 v1(115.75,21.25)
NetD10_1: D10.1 J11.3 R68.2 | length 40.3
  Top (LS) w0.18: R68.2@86.524,31.017 89.742,31.017 91.519,29.24 97.239,29.24 98.116,28.363 98.116,27.634 98.596,27.154 99.596,27.154 104.04,22.71 104.04,22.089 D10.1@102.701,20.75 ; D10.1@102.538,20.75 D10.1@102.701,20.75 ; J11.3@114.013,20.25 110.991,20.25 106.991,16.25 104.75,16.25 103.5,17.5 103.5,19.951 D10.1@102.701,20.75
NetJ1_A5: J1.A5 R1.1 R2.1 | length 4.6
  Top (LS) w0.3: R2.1@4.026,14.273 R1.1@5.526,14.273 5.526,14.223 4.94,13.637 4.94,12.235 5,12.175 5,11.968 J1.A5@5,11.43
NetJ1_B5: J1.B5 R3.1 R4.1 | length 13
  Top (LS) w0.18: v1(11.869,12.336) R4.1@12.569,12.336 R3.1@12.569,10.901
  Mid 1 (LS) w0.18: J1.B5@6.536,9.488 6.536,9.424 8.71,7.25 11,7.25 11.869,8.119 v1(11.869,12.336)
NetJ2_1: J2.1 R25.1 | length 2.6
  Top (LS) w0.18: J2.1@44.18,8.6 44.303,8.723 44.303,9.745 44.65,10.092 R25.1@44.65,11
NetJ2_2: J2.2 R28.1 | length 4.4
  Top (LS) w0.18: R28.1@40.239,12.459 40.239,11.686 41.41,10.515 41.41,8.83 J2.2@41.64,8.6
NetJ2_4: J2.4 R30.1 | length 7.3
  Top (LS) w0.18: J2.4@36.56,8.6 36.897,8.6 39.11,10.813 39.11,12.59 39.669,13.149 40.053,13.149 40.234,13.33 R30.1@40.234,13.924
NetJ2_5: J2.5 R31.1 | length 11.1
  Top (LS) w0.18: J2.5@34.02,8.6 35.365,9.945 37.733,9.945 38.75,10.962 38.75,12.74 38.864,12.854 38.864,13.855 39.669,14.659 40.088,14.659 40.239,14.81 R31.1@40.239,15.48
NetJ2_6: J2.6 R33.1 | length 14.8
  Top (LS) w0.18: J2.6@31.48,8.6 33.185,10.305 37.58,10.305 38.39,11.115 38.39,14.284 39.07,14.964 39.07,15.572 39.669,16.17 40.088,16.17 40.239,16.321 R33.1@40.239,16.991
NetLED1_2: LED1.2 R7.2 | length 7.5
  Top (LS) w0.18: LED1.2@21.839,7.308 21.914,7.308 22.149,7.543 22.149,7.618 23.75,9.219 23.75,12.814 22.954,13.61 R7.2@22.954,13.66
NetLED2_2: LED2.2 R9.1 | length 9
  Top (LS) w0.18: LED2.2@24.69,7.058 24.69,14.001 25.662,14.973 R9.1@26.382,14.973
NetLED3_2: LED3.2 R22.2 | length 14
  Top (LS) w0.18: LED3.2@23.219,7.058 23.219,7.719 24.25,8.75 24.25,14.07 25.5,15.32 25.5,19.2 25.662,19.362 R22.2@26.382,19.362
NetLED4_2: LED4.2 R49.1 | length 7.8
  Top (LS) w0.18: LED4.2@20.195,43 20.195,42.305 21,41.5 24.909,41.5 25.992,42.583 26.042,42.583 26.352,42.893 R49.1@26.352,42.943
NetLED5_1: LED5.1 R50.1 | length 5.1
  Top (LS) w0.18: LED5.1@18.25,44.4 18.325,44.4 19.065,45.14 22.105,45.14 22.752,44.493 R50.1@22.752,44.443
NetLED6_2: LED6.2 R78.1 | length 29.6
  Top (LS) w0.18: R78.1@103.032,32.051 112.151,32.051 v1(125.8,45.7)
  Bottom (HS) w0.18: v1(125.8,45.7) 125.8,46.872 LED6.2@125.828,46.9
NetLED7_2: LED7.2 R79.1 | length 25.7
  Top (LS) w0.18: R79.1@103.032,34.765 112.138,34.765 v1(123.072,45.7)
  Bottom (HS) w0.18: LED7.2@123,46.85 123.072,46.777 v1(123.072,45.7)
NetLED8_2: LED8.2 R80.1 | length 21.7
  Top (LS) w0.18: R80.1@103.032,37.48 111.98,37.48 v1(120.2,45.7)
  Bottom (HS) w0.18: LED8.2@120.172,46.85 120.2,46.822 v1(120.2,45.7)
NetLED9_2: LED9.2 R81.1 | length 17.8
  Top (LS) w0.18: R81.1@103.032,40.194 103.082,40.194 108.589,45.7 v1(117.4,45.7)
  Bottom (HS) w0.18: LED9.2@117.345,46.85 117.4,46.795 v1(117.4,45.7)
NetLED10_2: LED10.2 R82.1 | length 19.8
  Top (LS) w0.18: v1(10.85,43.9) 12.435,43.9 17.632,38.703 24.156,38.703 24.59,38.27 R82.1@24.59,37.6
  Bottom (HS) w0.18: LED10.2@10.756,46.95 10.85,46.856 v1(10.85,43.9)
NetLED11_2: LED11.2 R83.1 | length 15.7
  Top (LS) w0.18: v1(7.7,44.8) 9.186,44.8 16.386,37.6 R83.1@18.269,37.6
  Bottom (HS) w0.18: v1(7.7,44.8) 7.7,46.672 LED11.2@7.928,46.9
NetLED12_2: LED12.2 R84.1 | length 25.8
  Top (LS) w0.18: v1(5,44.6) 7.136,44.6 7.626,44.11 8.899,44.11 16.099,36.91 24.224,36.91 24.59,36.544 R84.1@24.59,35.965
  Bottom (HS) w0.18: v1(5,44.6) 5,46.8 LED12.2@5.1,46.9
NetLED13_2: LED13.2 R85.1 | length 22.3
  Top (LS) w0.18: v1(2.132,44.15) 2.532,43.75 8.75,43.75 16.535,35.965 R85.1@18.269,35.965
  Bottom (HS) w0.18: v1(2.132,44.15) 2.132,46.759 LED13.2@2.273,46.9
NetM1_D: M1.3 R53.1 R54.1 R55.1 R56.1 | length 6.8
  Top (LS) w0.5: R56.1@51.808,32.907 R55.1@52.958,32.907 ; M1.3@51.856,35.627 51.905,35.627 51.97,35.562 51.97,35.03 53.158,33.842 R55.1@53.158,32.907 ; R55.1@53.455,32.907 R54.1@54.508,32.907 R53.1@55.857,32.907
NetM2_G: M2.1 R46.1 R48.2 | length 8.2
  Top (LS) w0.3: R46.1@56.241,39.527 56.241,39.5 56.491,39.25 57.549,39.25 R48.2@57.799,39.5 ; M2.1@58.584,34.642 58.693,34.642 58.858,34.806 58.858,34.916 59.562,35.62 59.562,38.203 58.514,39.25 58.049,39.25 R48.2@57.799,39.5 ; R48.2@57.799,39.5 R48.2@57.799,39.527 R48.2@57.799,39.5
NetQ1_1: Q1.1 R32.2 R34.1 R35.1 | length 4.5
  Top (LS) w0.18: R32.2@41.739,25.517 43.269,25.517 R35.1@43.288,25.498 ; Q1.1@43.166,24.25 43.205,24.289 43.205,25.415 R35.1@43.288,25.498 ; R34.1@43.298,27.142 43.288,27.132 R35.1@43.288,25.498
NetQ1_2: Q1.2 R36.2 R37.2 | length 3
  Top (LS) w0.18: R37.2@41.739,24.107 R36.2@41.739,22.696 42.646,22.696 43.092,22.25 Q1.2@43.166,22.25
NetR6_2: R6.2 R7.1 | length 6.5
  Top (LS) w0.18: R7.1@22.954,15.16 22.954,15.21 23.711,15.967 23.711,20.081 24.149,20.518 24.149,20.568 24.159,20.578 24.307,20.578 R6.2@24.617,20.888
NetR8_1: R8.1 R9.2 | length 2.8
  Top (LS) w0.18: R8.1@26.382,16.436 27.015,16.436 27.132,16.319 27.132,15.09 27.249,14.973 R9.2@27.882,14.973
NetR10_2: R10.2 R11.2 R12.2 U2.4 | length 9.4
  Top (LS) w0.18: R12.2@27.882,7.658 28.602,7.658 28.855,7.911 28.855,10.042 29.108,10.295 29.108,10.918 29.108,11.541 28.602,12.047 R10.2@27.882,12.047 R11.2@27.882,13.51
  Top (LS) w0.2: 29.108,10.918 29.131,10.895 U2.4@30.805,10.895
NetR12_1: R12.1 R13.2 | length 1.5
  Top (LS) w0.18: R12.1@26.382,7.658 R13.2@26.382,9.121
NetR14_1: R14.1 R16.2 U3.16 | length 8.1
  Top (LS) w0.18: R16.2@24.61,22.496 24.616,22.502 24.616,23.249 24.876,23.509 25.096,23.509 25.356,23.769 25.356,24.184 25.462,24.29 26.166,24.29 26.889,23.567 29.895,23.567 30.065,23.737 30.065,23.755 30.192,23.882 U3.16@30.806,23.882
NetR17_2: R17.2 U3.13 | length 1.8
  Top (LS) w0.18: R17.2@29.309,26.093 29.359,26.093 30.07,25.382 U3.13@30.806,25.382
NetR18_1: R18.1 U3.15 | length 1.5
  Top (LS) w0.18: R18.1@29.325,24.257 29.45,24.382 U3.15@30.806,24.382
NetR19_2: R19.2 U3.14 | length 5.6
  Top (LS) w0.18: R19.2@26.1,26.11 26.05,26.06 26.05,25.51 26.364,25.196 29.646,25.196 29.96,24.882 U3.14@30.806,24.882
NetR20_1: R20.1 U3.17 | length 8.1
  Top (LS) w0.18: R20.1@27.882,17.899 28.517,17.899 28.622,18.004 28.622,23.004 28.825,23.207 30.044,23.207 30.22,23.382 U3.17@30.806,23.382
NetR20_2: R20.2 R22.1 | length 2.7
  Top (LS) w0.18: R20.2@26.382,17.899 27.015,17.899 27.142,18.026 27.142,18.419 27.312,18.589 27.754,18.589 27.881,18.716 R22.1@27.882,19.362
NetR21_1: R21.1 U3.24 | length 7
  Top (LS) w0.18: U3.24@33.931,22.257 33.931,22.003 34.642,21.292 34.985,21.292 35.113,21.164 37.923,21.164 38.113,21.354 R21.1@40.239,21.354
NetR21_2: R21.2 R23.2 | length 1.4
  Top (LS) w0.18: R23.2@41.739,19.967 R21.2@41.739,21.354
NetR23_1: R23.1 R24.2 | length 1.5
  Top (LS) w0.18: R24.2@40.239,18.456 R23.1@40.239,19.967
NetR36_1: R36.1 R37.1 R38.2 | length 5.2
  Top (LS) w0.18: R38.2@37.439,26.108 37.749,25.798 38.179,25.798 38.967,25.01 38.967,24.668 39.519,24.117 40.229,24.117 R37.1@40.239,24.107 R36.1@40.239,22.696
NetR39_2: R39.2 R40.1 | length 1.6
  Top (LS) w0.18: R39.2@32.24,29.417 33.804,29.417 R40.1@33.824,29.437
NetR42_2: R42.2 R48.1 U4.29 | length 27.5
  Top (LS) w0.18: U4.29@39.731,30.407 39.731,29.179 39.891,29.019 39.914,29.019 40.178,28.755 40.178,28.249 40.267,28.16 R42.2@40.267,27.142 ; R48.1@57.799,38.027 58.107,37.719 v1(58.502,37.719)
  Mid 1 (LS) w0.18: v1(40.178,28.77) 40.239,28.831 40.239,29.225 42.049,31.035 45.41,31.035 53.152,38.777 57.525,38.777 58.502,37.8 v1(58.502,37.719)
NetR43_1: R43.1 U4.2 | length 3.9
  Top (LS) w0.18: U4.2@42.731,38.811 42.745,38.825 42.745,39.27 42.997,39.522 43.65,39.522 45.301,41.173 R43.1@45.351,41.173
NetR44_1: R44.1 U4.3 | length 5.9
  Top (LS) w0.18: U4.3@42.231,38.457 42.231,39.306 42.958,40.033 43.466,40.033 44.215,40.782 44.215,41.691 45.274,42.75 R44.1@45.324,42.75
NetR45_2: R45.2 U4.44 | length 2.5
  Top (LS) w0.18: U4.44@44.506,35.182 45.837,35.182 46.011,35.008 R45.2@46.97,35.008
NetR47_1: R47.1 R49.2 | length 2.5
  Top (LS) w0.18: R49.2@26.352,44.443 26.352,44.393 27.442,43.303 27.842,43.303 28.152,42.993 R47.1@28.152,42.943
NetR50_2: R50.2 R51.1 | length 1.8
  Top (LS) w0.18: R50.2@22.752,42.943 R51.1@24.552,42.943
NetR52_1: R52.1 SB5.2 U6.21 | length 18.1
  Top (LS) w0.18: v1(51.01,30.277) 50.342,30.945 50.342,37.842 51.541,39.04 53.55,39.04 53.94,39.43 53.94,40.76 53.25,41.45 R52.1@53.25,41.5 53.21,41.54 SB5.2@53.21,43
  Bottom (HS) w0.2: U6.21@49.022,30.023 49.122,30.123 50.776,30.123 50.93,30.277 v1(51.01,30.277)
NetR53_2: R53.2 U6.17 | length 9.2
  Top (LS) w0.18: v1(55.75,30.5) 55.75,31.299 R53.2@55.857,31.407
  Bottom (HS) w0.18: U6.17@49.022,26.823 52.073,26.823 v1(55.75,30.5)
NetR54_2: R54.2 U6.18 | length 7.9
  Top (LS) w0.15: v1(54.5,30.5) 54.5,31.399 R54.2@54.508,31.407
  Bottom (HS) w0.15: U6.18@49.022,27.623 52.226,27.623 54.5,29.897 v1(54.5,30.5)
NetR55_2: R55.2 U6.19 | length 6
  Top (LS) w0.18: R55.2@53.158,31.407 53.25,31.314 v1(53.25,30.5)
  Bottom (HS) w0.18: U6.19@49.022,28.423 50.522,28.423 50.832,28.733 50.854,28.733 52.621,30.5 v1(53.25,30.5)
NetR56_2: R56.2 U6.20 | length 4.3
  Top (LS) w0.18: v1(51.743,30.386) 51.743,31.342 R56.2@51.808,31.407
  Bottom (HS) w0.18: U6.20@49.022,29.223 50.522,29.223 50.832,29.533 51.03,29.533 51.682,30.186 51.682,30.325 v1(51.743,30.386)
NetR64_2: R64.2 R65.2 SB6.1 SB6.2 | length 11.2
  Top (LS) w0.15: R65.2@81.35,11.698 81.43,11.618 SB6.2@81.43,9.657 SB6.1@82.35,9.657 v1(83.1,9.657) ; R64.2@88.75,10.5 89,10.25 v1(89,9.25)
  Mid 1 (LS) w0.15: v1(83.1,9.657) 83.151,9.657 83.461,9.346 83.596,9.346 88.809,9.346 88.905,9.25 v1(89,9.25)
NetR70_1: R70.1 R78.2 | length 2.5
  Top (LS) w0.18: R78.2@101.582,32.051 102.629,31.004 R70.1@102.672,31.004 ; R70.1@102.982,30.694 R70.1@102.672,31.004 ; R70.1@103.032,30.694 102.722,31.004 R70.1@102.672,31.004
NetR71_1: R71.1 R79.2 | length 2
  Top (LS) w0.18: R79.2@101.532,34.765 101.582,34.765 102.629,33.718 102.672,33.718 R71.1@102.947,33.444
NetR72_1: R72.1 R80.2 | length 1.5
  Top (LS) w0.18: R80.2@101.532,37.48 101.582,37.48 R72.1@102.629,36.432
NetR73_1: R73.1 R81.2 | length 2
  Top (LS) w0.18: R81.2@101.532,40.194 101.582,40.194 101.892,39.884 101.892,39.834 102.579,39.147 102.829,39.147 R73.1@103.032,38.944
NetR74_1: R74.1 R82.2 | length 1.7
  Top (LS) w0.18: R82.2@26.09,37.6 R74.1@27.75,37.6
NetR75_1: R75.1 R83.2 | length 1.7
  Top (LS) w0.18: R83.2@19.769,37.6 R75.1@21.429,37.6
NetR76_1: R76.1 R84.2 | length 1.7
  Top (LS) w0.18: R84.2@26.09,35.965 27.743,35.965 R76.1@27.75,35.958
NetR77_1: R77.1 R85.2 | length 1.7
  Top (LS) w0.18: R85.2@19.769,35.965 R77.1@21.429,35.965